# Altium PCB Sistema.PcbDoc (part 1 of 2)
Units mm, origin at the board's own origin, x right, y up, seen from the top; angles counter-clockwise.
Board outline 81.66 x 60.96 mm, 2 copper layers (Top Layer, Bottom Layer); 81 components, 62 nets, 413 pads, 84 vias.
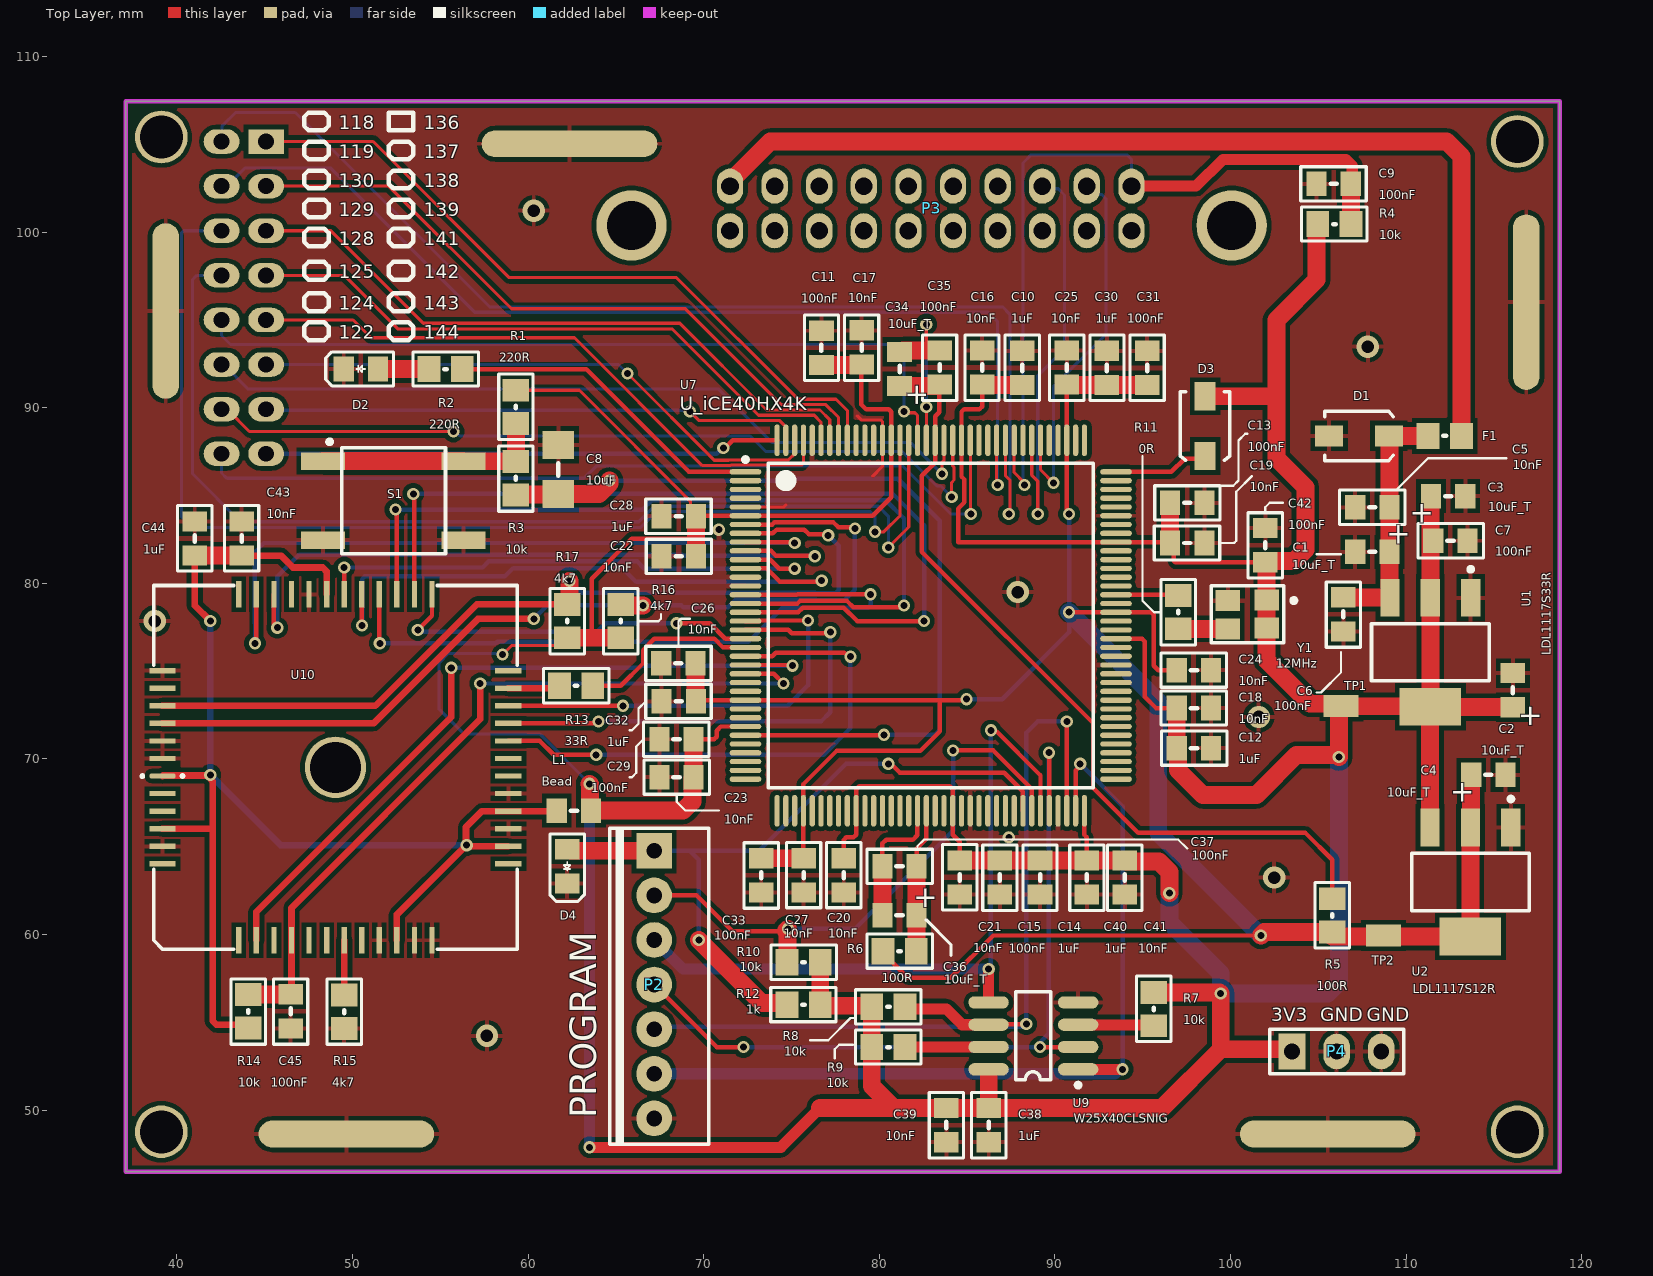
[diagram p0: Top Layer view]
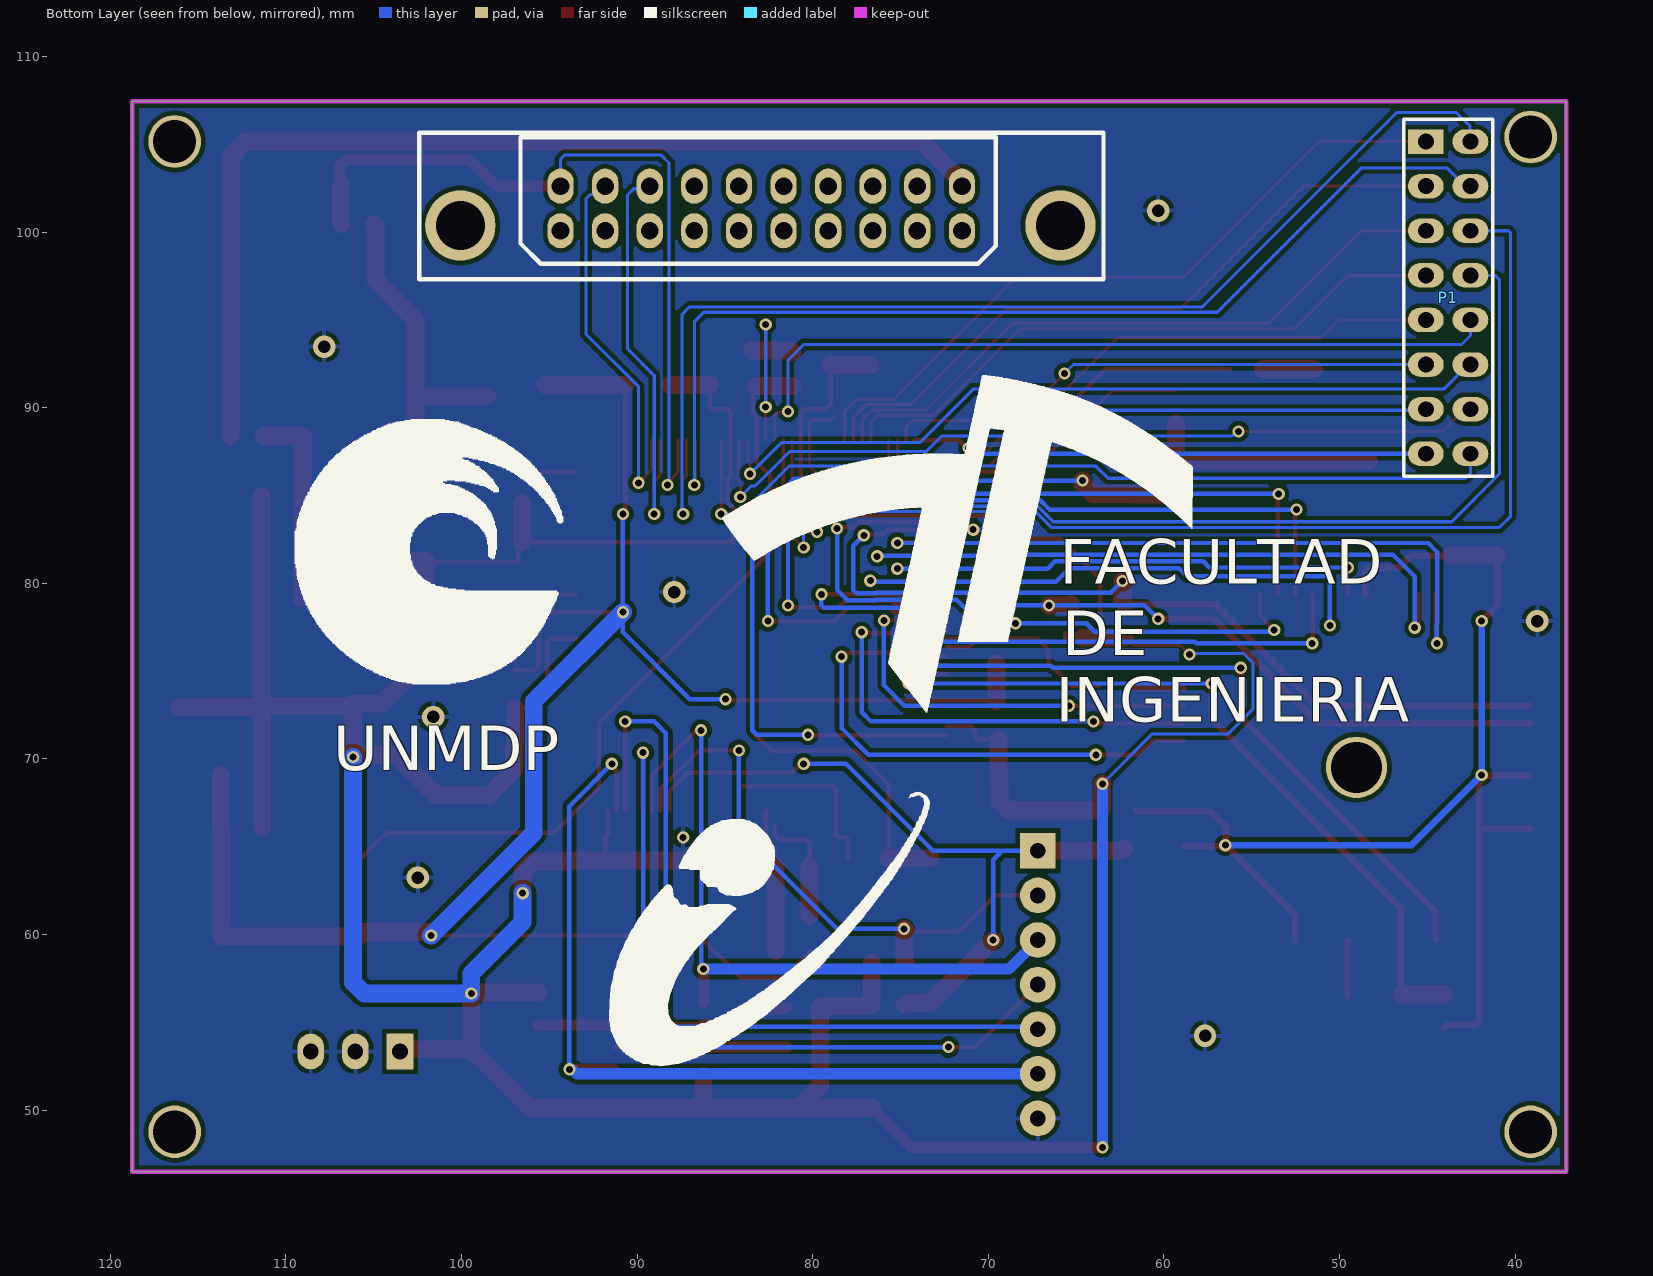
[diagram p1: Bottom Layer view, seen from below]
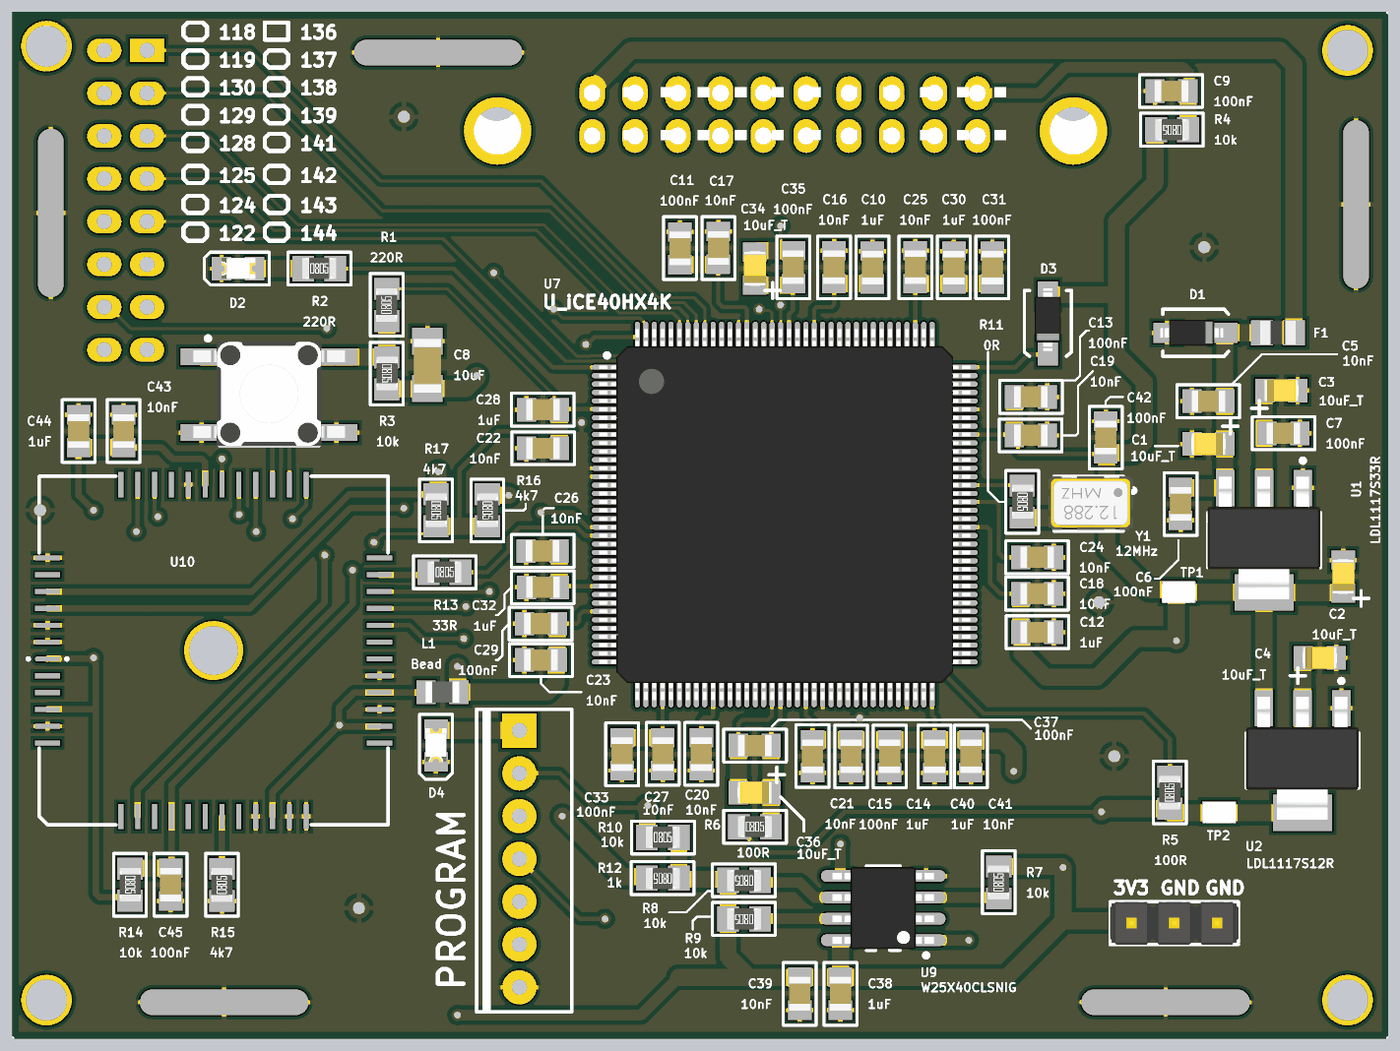
[diagram p2: 3D render of the assembled board from above, using the file's embedded part models]

## Layer stack, top to bottom
Top Solder: solder mask 0.0102, Solder Resist, Dk 3.5
Top Layer: signal copper 0.0356
Dielectric 1: dielectric 0.32, FR-4, Dk 4.8
Bottom Layer: signal copper 0.0356
Bottom Solder: solder mask 0.0102, Solder Resist, Dk 3.5

## Board outline
37.084,46.482 37.084,107.442 118.745,107.442 118.745,46.482

## Design rules (kind name [scope] priority, off if disabled: settings)
Clearance [All] p1: gap=0.254 ignorepadtopadclearanceinfootprint=FALSE except(0: Arc-Hole Track-Hole SMDPad-Hole THPad-Hole Via-Hole Fill-Hole Poly-Hole Region-Hole Text-Hole; 0.127: Arc-Arc Arc-Track Arc-SMDPad Arc-Text Track-Track Track-SMDPad Track-Text SMDPad-SMDPad SMDPad-Text THPad-Text Via-Text Fill-Text Poly-Text Region-Text Text-Text)
PlaneConnect [All] p1: planeconnectstyle=Relief reliefexpansion=0.254 reliefentries=4 reliefconductorwidth=0.178 reliefairgap=0.127
PolygonConnect [All] p1: connectstyle=Relief reliefconductorwidth=0.254 reliefentries=4 polygonreliefangle="90 Angle" airgapwidth=0.254
RoutingVias [All] p1: holewidth=0.4 width=0.7 viastyle="Through Hole" minholewidth=0.2 minwidth=0.6 maxholewidth=5 maxwidth=6
SilkToSolderMaskClearance [IsPad] p1: minsilkscreentomaskgap=0.127 clearancetoexposedcopper=TRUE
SolderMaskExpansion [All] p1: expansion=0.102 istentingtop=FALSE
Width [All] p1: maxlimit=1.016 minlimit=0.178 preferedwidth=0.254 minimp=50.000000 maximp=50.000000 favimp=50.000000
28 further rules are at their usual default settings.

## Classes and differential pairs
component class Sistema: P3
component class "Radiaton Sensor": C43 C44 C45 L1 R13 R14 R15 R16 R17 U10
component class Power: C1 C2 C3 C4 C5 C6 C7 D1 F1 P4 TP1 TP2 U1 U2
component class "Periferic Supply": C10 C11 C12 C13 C14 C15 C16 C17 C18 C19 C20 C21 C22 C23 C24 C25 C26 C27 C28 C29 C30 C31 C32 C33 C34 C35 C36 C37 C38 C39 C40 C41 C42 D3 D4 P2 R5 R6 R7 R8 R9 R10 R11 R12 U7 U9 Y1
component class "FPGA Banks": C8 C9 D2 P1 R1 R2 R3 R4 S1

## Components (designator, comment, footprint, x,y, rotation, side; value= is the part's Value field where it differs from the comment)
C1 "10uF_T" C_0805_2013_c 108.077,81.788 r180 top
C2 "10uF_T" C_0805_2013_c 116.078,73.914 r90 top
C3 "10uF_T" C_0805_2013_c 112.395,84.963 r0 top
C4 "10uF_T" C_0805_2013_c 114.681,69.088 r0 top
C5 "10nF" C_0805_2013_b 108.077,84.328 r0 top
C6 "100nF" C_0805_2013_b 106.426,78.232 r90 top
C7 "100nF" C_0805_2013_b 112.522,82.423 r180 top
C8 "10uF" C_1206_3216_A 61.722,86.487 r270 top
C9 "100nF" C_0805_2013_b 105.877,102.743 r0 top
C10 "1uF" C_0805_2013_b 88.138,92.263 r270 top
C11 "100nF" C_0805_2013_b 76.708,93.406 r270 top
C12 "1uF" C_0805_2013_b 97.917,70.612 r180 top
C13 "100nF" C_0805_2013_b 97.536,84.582 r180 top
C14 "1uF" C_0805_2013_b 89.154,63.246 r90 top
C15 "100nF" C_0805_2013_b 86.868,63.246 r90 top
C16 "10nF" C_0805_2013_b 85.852,92.288 r90 top
C17 "10nF" C_0805_2013_b 78.994,93.431 r90 top
C18 "10nF" C_0805_2013_b 97.917,72.898 r0 top
C19 "10nF" C_0805_2013_b 97.536,82.296 r0 top
C20 "10nF" C_0805_2013_b 77.978,63.373 r270 top
C21 "10nF" C_0805_2013_b 84.582,63.246 r270 top
C22 "10nF" C_0805_2013_b 68.58,81.534 r180 top
C23 "10nF" C_0805_2013_b 68.453,68.961 r180 top
C24 "10nF" C_0805_2013_b 97.917,75.057 r0 top
C25 "10nF" C_0805_2013_b 90.678,92.288 r90 top
C26 "10nF" C_0805_2013_b 68.555,75.438 r180 top
C27 "10nF" C_0805_2013_b 75.692,63.373 r270 top
C28 "1uF" C_0805_2013_b 68.58,83.82 r0 top
C29 "100nF" C_0805_2013_b 68.453,71.12 r0 top
C30 "1uF" C_0805_2013_b 92.964,92.263 r270 top
C31 "100nF" C_0805_2013_b 95.25,92.263 r270 top
C32 "1uF" C_0805_2013_b 68.58,73.279 r0 top
C33 "100nF" C_0805_2013_b 73.279,63.373 r90 top
C34 "10uF_T" C_0805_2013_c 81.153,92.202 r90 top
C35 "100nF" C_0805_2013_b 83.439,92.288 r90 top
C36 "10uF_T" C_0805_2013_c 81.153,61.087 r180 top
C37 "100nF" C_0805_2013_b 81.153,63.881 r180 top
C38 "1uF" C_0805_2013_b 86.233,49.149 r90 top
C39 "10nF" C_0805_2013_b 83.82,49.149 r90 top
C40 "1uF" C_0805_2013_b 91.821,63.246 r90 top
C41 "10nF" C_0805_2013_b 93.98,63.246 r90 top
C42 "100nF" C_0805_2013_b 101.981,82.169 r90 top
C43 "10nF" C_0805_2013_b 43.688,82.55 r270 top
C44 "1uF" C_0805_2013_b 41.021,82.55 r270 top
C45 "100nF" C_0805_2013_b 46.482,55.626 r90 top
D1 "MMSZ5231C-HE3_A-08" D_SOD-123 107.315,88.392 r0 top
D2 "GREEN" D_LED_0805_2013 50.48,92.202 r180 top
D3 "SD0805S020S0R5" D_SOD-123 98.552,88.949 r270 top
D4 "GREEN" D_LED_0805_2013 62.23,63.881 r270 top
F1 "0" F_0805_2012 112.202,88.392 r180 top
L1 "Bead" L_0805_2013 62.611,67.056 r180 top
P1 "Header 8x2" P_HDR2X8_3D 43.815,96.266 r270 bottom
P2 "PROGRAM" P_CON1X7 67.183,55.88 r270 top value="BORNERA 6 ENCH"
P3 "Header 20_H" P_DIN41612-20-H 82.978,101.346 r180 top
P4 "Header 3" P_HDR1X3_3D 106.045,53.34 r0 top
R1 "220R" R_0805_2012_a 59.309,90.043 r90 top
R2 "220R" R_0805_2012_a 55.306,92.202 r0 top
R3 "10k" R_0805_2012_a 59.309,85.979 r270 top
R4 "10k" R_0805_2012_a 105.918,100.457 r180 top
R5 "100R" R_0805_2012_a 105.791,61.087 r90 top
R6 "100R" R_0805_2012_a 81.153,59.055 r0 top
R7 "10k" R_0805_2012_a 95.631,55.753 r90 top
R8 "10k" R_0805_2012_a 80.518,53.594 r180 top
R9 "10k" R_0805_2012_a 80.518,55.88 r180 top
R10 "10k" R_0805_2012_a 75.692,58.42 r0 top
R11 "0R" R_0805_2012_a 97.028,78.359 r270 top
R12 "1k" R_0805_2012_a 75.692,56.007 r180 top
R13 "33R" R_0805_2012_a 62.738,74.168 r0 top
R14 "10k" R_0805_2012_a 44.069,55.626 r270 top
R15 "4k7" R_0805_2012_a 49.53,55.601 r90 top
R16 "4k7" R_0805_2012_a 65.278,77.851 r270 top
R17 "4k7" R_0805_2012_a 62.23,77.851 r270 top
S1 "Switch" S_SMD_SPST-NO 52.324,84.709 r0 top
TP1 "SMD Test Point" "TP SMD" 106.299,73.025 r0 top
TP2 "SMD Test Point" "TP SMD" 108.712,59.944 r0 top
U1 "LDL1117S33R" U_SOT-223 111.379,76.073 r270 top value=LDL1117S25R
U2 "LDL1117S12R" U_SOT-223 113.665,62.992 r270 top value=LDL1117S25R
U7 "U_iCE40HX4K" U_TQFP-144 82.931,77.597 r0 top
U9 "W25X40CLSNIG" U_SOIC-8_2 88.773,54.229 r180 top
U10 "Value" U_CLCC48_SOCKET 39.18,69.025 r90 top
Y1 "12MHz" Y_SMD-XTAL-12MHZ 101.092,78.232 r270 top

## Footprints (in the part's own frame and the unit in brackets; to place one, negate y for a bottom-side part, rotate by r counter-clockwise, add the part's x,y. Pads: shape width x height; smd on the part's side, far side on the other; paste and mask are expansions set on the pad)
C_0805_2013_b [mm] "Chip Capacitor; Body 2.0 x 1.3 mm (LxW typ)"
  rect 1.15x1.4 smd: 1(-0.975,0) 2(0.975,0)
  silkscreen extent -1.88,-0.97 1.85,0.97, body extent -1,-0.64 1,0.64, height 1.24
C_0805_2013_c [mm] "Chip Capacitor; Body 2.0 x 1.3 mm (LxW typ)"
  rect 1.15x1.4 smd: 1(-0.975,0) 2(0.975,0)
  silkscreen extent -0.18,0 0.18,0, body extent -1.02,-0.65 1.03,0.65, height 1.2
C_1206_3216_A [mm]
  rect 1.6x1.8 smd: 1(-1.4,0) 2(1.4,0)
  silkscreen extent -0.36,0 0.36,0, body extent -1.55,-0.81 1.65,0.81, height 1.61
D_LED_0805_2013 [mm] "Chip Capacitor; Body 2.0 x 1.3 mm (LxW typ)"
  rect 1.15x1.4 smd: 1(0.975,0) 2(-0.975,0)
  silkscreen extent -1.85,-0.97 2,0.97, body extent -1.02,-0.62 0.97,0.63, height 1.3
D_SOD-123 [mm] "SOD-123; 2 Leads; Body 2.7 x 1.6 mm, (LxW)"
  rect 1.6x1.2 smd: 1(1.7,0) 2(-1.7,0)
  silkscreen extent -1.95,-1.4 1.95,1.4, body extent -2.09,-0.78 1.63,0.77, height 1.35
F_0805_2012 [mm] "Chip Fuse; Body 2.0 x 1.3 mm (LxW typ)"
  rect 1.3x1.5 smd: 1(-0.95,0) 2(0.95,0)
  silkscreen extent -0.08,0 0.08,0, body extent -1.05,-0.7 1.05,0.7, height 0.56
L_0805_2013 [mm] "Chip Inductor; Body 2.0 x 1.3 mm (LxW typ)"
  rect 1.15x1.4 smd: 1(-0.975,0) 2(0.975,0)
  silkscreen extent -0.18,0 0.18,0, body extent -1,-0.64 1,0.64, height 1.04
P_CON1X7 [mil]
  rect 80x80 hole 35.43: 1(-350,0)
  round 80 hole 35.43: 2(-250,0) 3(-150,0) 4(-50,0) 5(50,0) 6(150,0) 7(250,0)
  silkscreen extent -400,-100 308,122
P_DIN41612-20-H [mm] "20 Position Din Connector Plug, Female Pins Gold Through Hole"
  oval 1.5x2 hole 1: A1(11.477,-1.27) A2(8.937,-1.27) A3(6.397,-1.27) A4(3.857,-1.27) A5(1.317,-1.27) A6(-1.223,-1.27) A7(-3.763,-1.27) A8(-6.303,-1.27) A9(-8.843,-1.27) A10(-11.383,-1.27) B1(11.477,1.27) B2(8.937,1.27) B3(6.397,1.27) B4(3.857,1.27) B5(1.317,1.27) B6(-1.223,1.27) B7(-3.763,1.27) B8(-6.303,1.27) B9(-8.843,1.27) B10(-11.383,1.27)
  round 4 hole 2.8: SOP(-17.087,0.97) SOP(17.088,0.97)
  body extent -19.41,-4.11 19.49,3.99, height 3.5
P_HDR1X3_3D [mil]
  rect 60x80 hole 35.43: 1(-100,0)
  oval 60x80 hole 35.43: 2(0,0) 3(100,0)
  silkscreen extent -150,-50 150,50, body extent -150,-50 150,50, height 374
P_HDR2X8_3D [mil] "Connector; Header; 8x2 Position"
  rect 55x80 hole 35.43: 1(-350,-50)
  oval 55x80 hole 35.43: 2(-350,50) 3(-250,-50) 4(-250,50) 5(-150,-50) 6(-150,50) 7(-50,-50) 8(-50,50) 9(50,-50) 10(50,50) 11(150,-50) 12(150,50) 13(250,-50) 14(250,50) 15(350,-50) 16(350,50)
  silkscreen extent -400,-100 400,100
R_0805_2012_a [mm] "Chip Resistor; Body 2.0 x 1.3 mm (LxW typ)"
  rect 1.3x1.5 smd: 1(-0.95,0) 2(0.95,0)
  silkscreen extent -1.85,-0.97 1.88,0.97, body extent -1,-0.61 1,0.64, height 0.6
S_SMD_SPST-NO [mm] "Pulsador SMD"
  rect 2.5x1 smd: 1(-4,2.25) 1(4,2.25) 2(-4,-2.25) 2(4,-2.25)
  silkscreen extent -3.75,-3.02 2.98,3.47, body extent -4.5,-3.05 4.5,3.15, height 4.3
"TP SMD" [mm] "Test Point SMD"
  rect 2x1.25 smd: 1(0,0)
  body extent -0.99,-0.67 1.01,0.58, height 0.84
U_CLCC48_SOCKET [mm]
  oval 0.3x1.5 smd: 1(0,0)
  rect 0.3x1.5 smd: 2(-1,0) 3(-2,0) 4(-3,0) 5(-4,0) 6(-5,0) 19(-5,-19.7) 20(-4,-19.7) 21(-3,-19.7) 22(-2,-19.7) 23(-1,-19.7) 24(0,-19.7) 25(1,-19.7) 26(2,-19.7) 27(3,-19.7) 28(4,-19.7) 29(5,-19.7) 30(6,-19.7) 43(6,0) 44(5,0) 45(4,0) 46(3,0) 47(2,0) 48(1,0)
  rect 1.5x0.3 smd: 7(-9.35,-4.35) 8(-9.35,-5.35) 9(-9.35,-6.35) 10(-9.35,-7.35) 11(-9.35,-8.35) 12(-9.35,-9.35) 13(-9.35,-10.35) 14(-9.35,-11.35) 15(-9.35,-12.35) 16(-9.35,-13.35) 17(-9.35,-14.35) 18(-9.35,-15.35) 31(10.35,-15.35) 32(10.35,-14.35) 33(10.35,-13.35) 34(10.35,-12.35) 35(10.35,-11.35) 36(10.35,-10.35) 37(10.35,-9.35) 38(10.35,-8.35) 39(10.35,-7.35) 40(10.35,-6.35) 41(10.35,-5.35) 42(10.35,-4.35)
  round 3.5 hole 2.9: 14(0.498,-9.854)
  silkscreen extent -9.85,-20.2 10.85,1.18
U_SOIC-8_2 [mm] "SOIC, 8-Leads, Body 4.9x3.9mm, Pitch 1.27mm, IPC Low Density"
  oval 2.3x0.7 smd: 1(-2.55,1.905) 2(-2.55,0.635) 3(-2.55,-0.635) 4(-2.55,-1.905) 5(2.55,-1.905) 6(2.55,-0.635) 7(2.55,0.635) 8(2.55,1.905)
  silkscreen extent -2.68,-2.5 1,2.93, body extent -3.01,-2.45 3.01,2.45, height 1.5
U_SOT-223 [mm]
  rect 2.15x1.1 smd: 1(-3.1,2.3) 2(-3.1,0) 3(-3.1,-2.3)
  rect 2.15x3.5 smd: 4(3.1,0)
  silkscreen extent -4.85,-3.35 1.63,3.35, body extent -3.78,-3.37 3.52,3.33, height 1.8
U_TQFP-144 [mm]
  oval 1.8x0.3 smd: 1(-10.55,8.75) 2(-10.55,8.25) 3(-10.55,7.75) 4(-10.55,7.25) 5(-10.55,6.75) 6(-10.55,6.25) 7(-10.55,5.75) 8(-10.55,5.25) 9(-10.55,4.75) 10(-10.55,4.25) 11(-10.55,3.75) 12(-10.55,3.25) 13(-10.55,2.75) 14(-10.55,2.25) 15(-10.55,1.75) 16(-10.55,1.25) 17(-10.55,0.75) 18(-10.55,0.25) 19(-10.55,-0.25) 20(-10.55,-0.75) 21(-10.55,-1.25) 22(-10.55,-1.75) 23(-10.55,-2.25) 24(-10.55,-2.75) 25(-10.55,-3.25) 26(-10.55,-3.75) 27(-10.55,-4.25) 28(-10.55,-4.75) 29(-10.55,-5.25) 30(-10.55,-5.75) 31(-10.55,-6.25) 32(-10.55,-6.75) 33(-10.55,-7.25) 34(-10.55,-7.75) 35(-10.55,-8.25) 36(-10.55,-8.75) 73(10.55,-8.75) 74(10.55,-8.25) 75(10.55,-7.75) 76(10.55,-7.25) 77(10.55,-6.75) 78(10.55,-6.25) 79(10.55,-5.75) 80(10.55,-5.25) 81(10.55,-4.75) 82(10.55,-4.25) 83(10.55,-3.75) 84(10.55,-3.25) 85(10.55,-2.75) 86(10.55,-2.25) 87(10.55,-1.75) 88(10.55,-1.25) 89(10.55,-0.75) 90(10.55,-0.25) 91(10.55,0.25) 92(10.55,0.75) 93(10.55,1.25) 94(10.55,1.75) 95(10.55,2.25) 96(10.55,2.75) 97(10.55,3.25) 98(10.55,3.75) 99(10.55,4.25) 100(10.55,4.75) 101(10.55,5.25) 102(10.55,5.75) 103(10.55,6.25) 104(10.55,6.75) 105(10.55,7.25) 106(10.55,7.75) 107(10.55,8.25) 108(10.55,8.75)
  oval 0.3x1.8 smd: 37(-8.75,-10.55) 38(-8.25,-10.55) 39(-7.75,-10.55) 40(-7.25,-10.55) 41(-6.75,-10.55) 42(-6.25,-10.55) 43(-5.75,-10.55) 44(-5.25,-10.55) 45(-4.75,-10.55) 46(-4.25,-10.55) 47(-3.75,-10.55) 48(-3.25,-10.55) 49(-2.75,-10.55) 50(-2.25,-10.55) 51(-1.75,-10.55) 52(-1.25,-10.55) 53(-0.75,-10.55) 54(-0.25,-10.55) 55(0.25,-10.55) 56(0.75,-10.55) 57(1.25,-10.55) 58(1.75,-10.55) 59(2.25,-10.55) 60(2.75,-10.55) 61(3.25,-10.55) 62(3.75,-10.55) 63(4.25,-10.55) 64(4.75,-10.55) 65(5.25,-10.55) 66(5.75,-10.55) 67(6.25,-10.55) 68(6.75,-10.55) 69(7.25,-10.55) 70(7.75,-10.55) 71(8.25,-10.55) 72(8.75,-10.55) 109(8.75,10.55) 110(8.25,10.55) 111(7.75,10.55) 112(7.25,10.55) 113(6.75,10.55) 114(6.25,10.55) 115(5.75,10.55) 116(5.25,10.55) 117(4.75,10.55) 118(4.25,10.55) 119(3.75,10.55) 120(3.25,10.55) 121(2.75,10.55) 122(2.25,10.55) 123(1.75,10.55) 124(1.25,10.55) 125(0.75,10.55) 126(0.25,10.55) 127(-0.25,10.55) 128(-0.75,10.55) 129(-1.25,10.55) 130(-1.75,10.55) 131(-2.25,10.55) 132(-2.75,10.55) 133(-3.25,10.55) 134(-3.75,10.55) 135(-4.25,10.55) 136(-4.75,10.55) 137(-5.25,10.55) 138(-5.75,10.55) 139(-6.25,10.55) 140(-6.75,10.55) 141(-7.25,10.55) 142(-7.75,10.55) 143(-8.25,10.55) 144(-8.75,10.55)
  silkscreen extent -10.67,-9.25 9.25,9.57, body extent -11.01,-11.01 11.01,11.01, height 1.63
Y_SMD-XTAL-12MHZ [mm]
  rect 1.2x1.4 smd: 1(-0.826,0.965) 2(-0.787,-1.245) 3(0.826,-1.245) 4(0.787,0.965)
  silkscreen extent -1.63,-2.18 1.62,2.64, body extent -1.65,-2.51 1.55,2.49, height 1.2

## Part data
C1 C2 C3 C4 C34 C36: library part C_10uF_10V_b, "Capacitor SMD 0805 Tant", Manufacturer=Vishay, Manufacturer Part Number=TMCP1A106MTRF, Supplier Part Number 1=74-TMCP1A106MTRF, Category="Tantalum Capacitors", Pricing 1="1=0,3, 10=0,152, 50=0,152, 100=0,098, 1000=0,082, 10000=0,067 (USD)", RoHS=Yes, RoHS Compliant=Yes, Stock 1=7293, Supplier 1=Mouser
C5 C16 C17 C18 C19 C20 C21 C22 C23 C24 C25 C26 C27 C39 C41 C43: library part C_10nF_50V_b, "Capacitor SMD 0805", Case Code (Imperial)=0805, Case Code (Metric)=2012, Dielectric=X7R, Dielectric Material=Ceramic, Manufacturer=KEMET, Manufacturer Part Number=C0805C103J5RAC7210, Max Operating Temperature=125°C, Min Operating Temperature=-55°C, Package Quantity=10000, Supplier Part Number 1=80-C0805C103J5R7210, Tolerance=5%, Voltage Rating=50V, Case/Package=0805, Category="Ceramic Capacitors", ComponentLink1Description=http://www.mouser.com/ds/2/212/KEM_C1002_X7R_SMD-1102033.pdf?src-supplier=Mouser, ComponentLink1URL=http://www.mouser.com/ds/2/212/KEM_C1002_X7R_SMD-1102033.pdf?src-supplier=Mouser, ComponentLink2Description=http://components.arrow.com/part/dataview/3450688S9650973N7429?src-supplier=Arrow+Electronics, ComponentLink2URL=http://components.arrow.com/part/dataview/3450688S9650973N7429?src-supplier=Arrow+Electronics, ComponentLink3Description=https://datasheet.octopart.com/C0805C103J5RAC7210-KEMET-datasheet-68331906.pdf?src-supplier=Farnell, ComponentLink3URL=https://datasheet.octopart.com/C0805C103J5RAC7210-KEMET-datasheet-68331906.pdf?src-supplier=Farnell, ComponentLink4Description=https://api.kemet.com/component-edge/download/datasheet/C0805C103J5RAC7210.pdf?src-supplier=Digikey, ComponentLink4URL=https://api.kemet.com/component-edge/download/datasheet/C0805C103J5RAC7210.pdf?src-supplier=Digikey, ComponentLink5Description=https://datasheet.octopart.com/C0805C103J5RAC7210-KEMET-datasheet-37550250.pdf?src-supplier=Electro+Sonic, ComponentLink5URL=https://datasheet.octopart.com/C0805C103J5RAC7210-KEMET-datasheet-37550250.pdf?src-supplier=Electro+Sonic, ComponentLink6Description=https://datasheet.octopart.com/C0805C103J5RAC7210-KEMET-datasheet-166547538.pdf?src-supplier=TME, ComponentLink6URL=https://datasheet.octopart.com/C0805C103J5RAC7210-KEMET-datasheet-166547538.pdf?src-supplier=TME, Depth=1.25mm, Lead Pitch=0.75mm, Length=2mm, Packaging="Tape and Reel", Pricing 1="1=0,1, 10=0,034, 50=0,034, 100=0,02, 1000=0,014, 10000=0,009 (USD)", RoHS=Yes, RoHS Compliant=Yes, Series="SMD Comm X7R", Stock 1=30128, Supplier 1=Mouser, Termination=SMD/SMT, Voltage Rating (DC)=50V
C6 C7 C9 C11 C13 C15 C29 C31 C33 C35 C37 C42 C45: library part C_100nF_50V_b, "Capacitor SMD 0805", Case Code (Imperial)=0805, Case Code (Metric)=2012, Dielectric=X7R, Insulation Resistance=100GR, Manufacturer=Yageo, Manufacturer Part Number=CC0805KRX7R9BB104, Max Operating Temperature=125°C, Min Operating Temperature=-55°C, Package Quantity=4000, Supplier Part Number 1=311-1140-1-ND, Tolerance=10%, Voltage=50V, Case/Package=0805, Category="Ceramic Capacitors", ComponentLink1Description=https://datasheet.ciiva.com/11786/0900766b80d84f1d-11786009.pdf?src-supplier=Rs, ComponentLink1URL=https://datasheet.ciiva.com/11786/0900766b80d84f1d-11786009.pdf?src-supplier=Rs, ComponentLink2Description=https://datasheet.ciiva.com/46393/1734573-46393307.pdf?src-supplier=Element14, ComponentLink2URL=https://datasheet.ciiva.com/46393/1734573-46393307.pdf?src-supplier=Element14, ComponentLink3Description=https://datasheet.ciiva.com/155/mlccorderingcode-155930.pdf?src-supplier=Digikey, ComponentLink3URL=https://datasheet.ciiva.com/155/mlccorderingcode-155930.pdf?src-supplier=Digikey, ComponentLink4Description=https://datasheet.ciiva.com/155/mlccorderingcode-155929.pdf?src-supplier=Digikey, ComponentLink4URL=https://datasheet.ciiva.com/155/mlccorderingcode-155929.pdf?src-supplier=Digikey, ComponentLink5Description=https://datasheet.ciiva.com/155/mlccorderingcode-155931.pdf?src-supplier=Digikey, ComponentLink5URL=https://datasheet.ciiva.com/155/mlccorderingcode-155931.pdf?src-supplier=Digikey, ComponentLink6Description=https://datasheet.ciiva.com/11464/upy-gphc-x7r-6-3v-to-50v-8-11464757.pdf?src-supplier=Avnet, ComponentLink6URL=https://datasheet.ciiva.com/11464/upy-gphc-x7r-6-3v-to-50v-8-11464757.pdf?src-supplier=Avnet, ComponentLink7Description=https://datasheet.ciiva.com/28450/1489800-28450805.pdf?src-supplier=Element14, ComponentLink7URL=https://datasheet.ciiva.com/28450/1489800-28450805.pdf?src-supplier=Element14, ComponentLink8Description=https://datasheet.ciiva.com/29242/445210-da-01-en-kerko-chip-0805-x7r-0-1uf-10proz-50vg-29242074.pdf?src-supplier=Conrad, ComponentLink8URL=https://datasheet.ciiva.com/29242/445210-da-01-en-kerko-chip-0805-x7r-0-1uf-10proz-50vg-29242074.pdf?src-supplier=Conrad, Depth=1.25mm, Halogen Free=5694HalogenFree, Height=0.85mm, Lead Free=5697LeadFree, Length=2mm, Material=Ceramic, Mounting Technology="Surface Mount", Packaging="Tape and Reel", Pins=2, Pricing 1="1=0,1, 10=0,07, 50=0,0418, 100=0,0329, 500=0,02428, 1000=0,0201 (USD)", Radiation Hardening=No, Reach SVHC Compliant=No, RoHS=Yes, RoHS Compliant=Yes, Series=CC, Stock 1=5306374, Supplier 1=Digikey, Termination=SMD/SMT, Voltage Rating=50V
C8: library part C_10uF_25V_c, "Capacitor SMD 1206", Case Code (Imperial)=1206, Case Code (Metric)=3216, Dielectric=X7R, Manufacturer=Samsung, Manufacturer Part Number=CL31B106KAHNFNE, Max Operating Temperature=125°C, Min Operating Temperature=-55°C, Supplier Part Number 1=1276-3100-1-ND, Tolerance=10%, Voltage Rating=25V, Case/Package=1206, Category="Ceramic Capacitors", ComponentLink1Description=https://datasheet.ciiva.com/25795/cl31b106kahnfne-25795136.pdf?src-supplier=Digikey, ComponentLink1URL=https://datasheet.ciiva.com/25795/cl31b106kahnfne-25795136.pdf?src-supplier=Digikey, Construction=Flat, Depth=1.6mm, Height=1.6mm, Lead Free="Lead Free", Length=3.2mm, Mounting Technology="Surface Mount", Packaging="Tape and Reel", Pricing 1="1=0,23, 10=0,149, 50=0,094, 100=0,0752, 500=0,0543, 1000=0,04804 (USD)", Radiation Hardening=No, RoHS=Yes, RoHS Compliant=Yes, Series=CL, Stock 1=466532, Supplier 1=Digikey
C10 C12 C14 C28 C30 C32 C38 C40 C44: library part C_1uF_50V_b, "Capacitor SMD 0805", JLCPCB Part #=C17287262, Manufacturer="Cal-Chip Electronics", Manufacturer Part Number=GMC21X7R105K50NT, Supplier Part Number 1=4713-GMC21X7R105K50NTCT-ND, Category="Ceramic Capacitors", Pricing 1="1=0,16, 10=0,106, 50=0,0632, 100=0,0497, 500=0,03672, 1000=0,0304 (USD)", RoHS=Yes, Stock 1=1410, Supplier 1=Digikey
D1: library part D_MMSZ5231C-HE3_A-08, "Diode SMD SOD-123 Zener 5V1", Manufacturer="Vishay Semiconductors", Manufacturer Part Number=MMSZ5226C-E3-08, Max Operating Temperature=150°C, Max Power Dissipation=500mW, Max Reverse Leakage Current=25uA, Min Operating Temperature=-55°C, Package Quantity=3000, Supplier Part Number 1=78-MMSZ5231CHE3_A-08, Tolerance=2%, Zener Current=20mA, Zener Voltage=3.3V, Category="Zener Diodes", ComponentLink1Description=Datasheet, ComponentLink1URL=https://www.vishay.com/docs/86344/mmsz5225_to_mmsz5267.pdf, Impedance=28R, Mounting Technology="Surface Mount", Packaging="Tape and Reel", Power Dissipation=500mW, Pricing 1="1=0,29, 10=0,198, 50=0,198, 100=0,089, 1000=0,062, 10000=0,041 (USD)", RoHS=Yes, RoHS Compliant=Yes, Series="Automotive, AEC-Q101", Stock 1=14347, Supplier 1=Mouser, Voltage Tolerance=2%, Weight=0.000363oz
D2 D4: library part D_LED_SMD_0805, "(Modificar) Diode SMD 0805"
D3: library part D_SD0805S020S0R5, "Diode SMD D_SD0805S020S0R5", Average Rectified Current=5A, Case/Package=SMC, Forward Voltage=700mV, Manufacturer=Diodes, Manufacturer Part Number=B550C-13-F, Max Forward Surge Current (Ifsm)=100A, Max Operating Temperature=125°C, Max Repetitive Reverse Voltage (Vrrm)=50V, Max Reverse Current=500uA, Min Operating Temperature=-55°C, Package Quantity=3000, Supplier Part Number 1=478-7799-1-ND, Category="Rectifier Diodes", Contact Plating=Tin,Matte, Current Rating=5A, Forward Current=5A, Height=2.5mm, Lead Free="Lead Free", Length=7.11mm, Max Reverse Voltage (DC)=50V, Mounting Technology="Surface Mount", Output Current=5A, Packaging="Tape and Reel", Peak Non-Repetitive Surge Current=100A, Pins=2, Polarity=Standard, Pricing 1="1=0,56, 10=0,476, 100=0,3309, 500=0,25834, 1000=0,20998 (USD)", Radiation Hardening=No, Reach SVHC Compliant=No, RoHS=Yes, RoHS Compliant=Yes, Series=-, Stock 1=65197, Supplier 1=Digikey, Termination=SMD/SMT, Voltage Rating (DC)=50V, Weight=0.007408oz, Width=6.22mm
F1: library part F_?_0805, "(Generico) Fuse SMD 0805", Supplier Part Number 1=SF-1206S200-2CT-ND, LatestRevisionDate=17-Jul-2002, LatestRevisionNote="Re-released for DXP Platform.", Origin=TAIWAN, PackageDescription="Thru-Hole; 2 Leads", PackageReference=PIN-W2/E2.8, Published=8-Jun-2000, Publisher="Altium Limited", Supplier 1=Digi-Key
L1: library part L_Bead, "Inductor SMD 0805", Case Code (Imperial)=0805, Case Code (Metric)=2012, Manufacturer=Pulse, Manufacturer Part Number=PE-0805PFB600ST, Max Current Rating=3A, Max Operating Temperature=105°C, Min Operating Temperature=-40°C, Package Quantity=4000, Supplier Part Number 1=673-PE-0805PFB600ST, Case/Package=0805, Category="Ferrite Beads and Chips", ComponentLink1Description=https://productfinder.pulseeng.com/doc_type/WEB301/doc_num/WC706/doc_part/WC706.pdf?src-supplier=Digikey, ComponentLink1URL=https://productfinder.pulseeng.com/doc_type/WEB301/doc_num/WC706/doc_part/WC706.pdf?src-supplier=Digikey, ComponentLink2Description=http://productfinder.pulseeng.com/products/datasheets/WC706.pdf?src-supplier=Digikey, ComponentLink2URL=http://productfinder.pulseeng.com/products/datasheets/WC706.pdf?src-supplier=Digikey, Height=0.041inch, Length=0.079inch, Mounting Technology="Surface Mount", Number of Lines=1, Packaging="Cut Tape", Pricing 1="1=0,1, 10=0,051, 50=0,051, 100=0,035, 1000=0,025, 10000=0,02 (USD)", RoHS=Yes, RoHS Compliant=Yes, Series=PFB, Stock 1=58506, Supplier 1=Mouser, Width=0.049inch
P1: library part "P_Conector 8x2"
P2: library part "P_BORNERA 7", "Bornera 7"
P3: library part P_Conector_20_H, "Conector 20 Position Din Connector Plug, Male Pins Gold Through Hole, Right Angle", Current Rating=2A, Flammability Rating="UL94 V-0", Manufacturer="HARTING Technology", Manufacturer Part Number=09242206825, Package Quantity=20, Supplier Part Number 1=617-09-24-220-6825, Category="DIN 41612 Connectors", ComponentLink1Description=https://datasheet.ciiva.com/11731/0900766b811d3497-11731844.pdf?src-supplier=Rs, ComponentLink1URL=https://datasheet.ciiva.com/11731/0900766b811d3497-11731844.pdf?src-supplier=Rs, Connector Type=Receptacle, Contact Material="Copper Alloy", Contact Plating=Gold, Gender=Female, Housing Material=Thermoplastic, Insulation Material=Glass, Lead Free="Lead Free", Mounting Technology="Through Hole", Number of Contacts=20, Number of Positions=20, Number of Rows=2, Orientation=Straight, Packaging=Bulk, Pitch=2.54mm, Pricing 1="1=4,87, 10=4,27, 50=4,27, 100=3,55, 1000=2,94, 10000=2,74 (USD)", RoHS=Yes, RoHS Compliant=Yes, Series="DIN 41612", Shell Size=3B, Stock 1=166, Supplier 1=Mouser, Tail Length=4.5mm, Termination=Solder
P4: library part "P_Header 3", "Header, 3-Pin"
R1 R2: library part R_220R_b, "Resistor SMD 0805", Case Code (Imperial)=0805, Case Code (Metric)=2012, Manufacturer=Bourns, Manufacturer Part Number=CR0805-FX-2200ELF, Max Operating Temperature=155°C, Max Power Dissipation=125mW, Min Operating Temperature=-55°C, Package Quantity=5000, Supplier Part Number 1=CR0805-FX-2200ELFCT-ND, Temperature Coefficient=100ppm/°C, Tolerance=1%, Voltage Rating=150V, Case/Package=0805, Category="Chip SMD Resistors", ComponentLink1Description=https://datasheet.ciiva.com/5540/chpreztr-5540846.pdf?src-supplier=Mouser, ComponentLink1URL=https://datasheet.ciiva.com/5540/chpreztr-5540846.pdf?src-supplier=Mouser, Contact Plating=Tin, Features="Moisture Resistant", Height=0.5mm, Length=2mm, Mounting Technology="Surface Mount", Number of Terminations=2, Packaging="Tape and Reel", Power Rating=125mW, Pricing 1="1=0,1, 10=0,021, 50=0,0132, 100=0,011, 500=0,00744, 1000=0,00639 (USD)", Radiation Hardening=No, RoHS=Yes, RoHS Compliant=Yes, Series=CR0805, Stock 1=162372, Supplier 1=Digikey, Termination=SMD/SMT, Thickness=508um, Width=1.25mm
R3 R4 R7 R8 R9 R10 R14: library part R_10k_b, "Resistor SMD 0805", Case Code (Imperial)=0805, Case Code (Metric)=2012, Manufacturer=Yageo, Manufacturer Part Number=AC0805FR-0710KL, Max Operating Temperature=155°C, Max Power Dissipation=125mW, Min Operating Temperature=-55°C, Package Quantity=1, Supplier Part Number 1=311-10KLGCT-ND, Temperature Coefficient=100ppm/°C, Tolerance=1%, Voltage Rating=150V, Case/Package=0805, Category="Chip SMD Resistors", ComponentLink1Description=http://www.yageo.com/NewPortal/yageodocoutput?fileName=/pdf/R-Chip/PYu-AC_51_RoHS_L_6.pdf&src-supplier=Digikey, ComponentLink1URL=http://www.yageo.com/NewPortal/yageodocoutput?fileName=/pdf/R-Chip/PYu-AC_51_RoHS_L_6.pdf&src-supplier=Digikey, ComponentLink2Description=http://www.yageo.com/documents/recent/PYu-AC_51_RoHS_L_2_revised.pdf?src-supplier=Future+Electronics, ComponentLink2URL=http://www.yageo.com/documents/recent/PYu-AC_51_RoHS_L_2_revised.pdf?src-supplier=Future+Electronics, ComponentLink3Description=http://www.yageo.com/NewPortal/yageodocoutput?fileName=/pdf/R-Chip/PYu-AC_51_RoHS_L_6.pdf&src-supplier=NAC+Semi, ComponentLink3URL=http://www.yageo.com/NewPortal/yageodocoutput?fileName=/pdf/R-Chip/PYu-AC_51_RoHS_L_6.pdf&src-supplier=NAC+Semi, ComponentLink4Description=http://www.yageo.com/NewPortal/yageodocoutput?fileName=/pdf/R-Chip/PYu-AC_51_RoHS_L_6.pdf&src-supplier=Rutronik, ComponentLink4URL=http://www.yageo.com/NewPortal/yageodocoutput?fileName=/pdf/R-Chip/PYu-AC_51_RoHS_L_6.pdf&src-supplier=Rutronik, Construction=Rectangular, Depth=1.25mm, Features="Moisture Resistant,Automotive AEC-Q200,Anti-Sulfur", Height=0.024inch, Lead Free="Lead Free", Length=0.079inch, Military Standard=Not, Number of Terminations=2, Packaging="Tape and Reel", Power Rating=125mW, Pricing 1="1=0,1, 10=0,031, 50=0,0198, 100=0,0166, 500=0,01152, 1000=0,00997 (USD)", RoHS=Yes, RoHS Compliant=Yes, Series=AC, Stock 1=480247, Supplier 1=Digikey, Termination=SMD/SMT, Width=0.049inch
R5 R6: library part R_100R_b, "Resistor SMD 0805", Case Code (Imperial)=0805, Case Code (Metric)=2012, Manufacturer="Vishay Dale", Manufacturer Part Number=CRCW0805100RFKEA, Max Operating Temperature=155°C, Max Power Dissipation=125mW, Min Operating Temperature=-55°C, Package Quantity=10, Resistance Tolerance=1%, Resistor Type="Thick Film", Supplier Part Number 1=71-CRCW0805-100-E3, Temperature Coefficient=100ppm/°C, Voltage Rating=150V, Case/Package=0805, Category="Chip SMD Resistors", ComponentLink1Description=https://datasheet.ciiva.com/2495/dcrcwe3-2495842.pdf?src-supplier=Digikey, ComponentLink1URL=https://datasheet.ciiva.com/2495/dcrcwe3-2495842.pdf?src-supplier=Digikey, ComponentLink2Description=https://datasheet.ciiva.com/16760/70201119-16760940.pdf?src-supplier=Allied+Electronics, ComponentLink2URL=https://datasheet.ciiva.com/16760/70201119-16760940.pdf?src-supplier=Allied+Electronics, ComponentLink3Description=https://datasheet.ciiva.com/16777/70201119-16777129.pdf?src-supplier=Allied+Electronics, ComponentLink3URL=https://datasheet.ciiva.com/16777/70201119-16777129.pdf?src-supplier=Allied+Electronics, ComponentLink4Description=https://datasheet.ciiva.com/5546/dcrcwe3-109170-5546700.pdf?src-supplier=Mouser, ComponentLink4URL=https://datasheet.ciiva.com/5546/dcrcwe3-109170-5546700.pdf?src-supplier=Mouser, Construction=Rectangular, Contact Plating=Tin, Depth=1.25mm, Features="Automotive AEC-Q200", Height=0.45mm, Lead Free=5697LeadFree, Length=2mm, Military Standard=Not, Number of Terminations=2, Packaging="Tape and Reel", Pins=2NUMBER, Power Rating=125mW, Pricing 1="1=0,1, 10=0,025, 50=0,025, 100=0,015, 1000=0,012, 10000=0,008 (USD)", Radiation Hardening=No, Reach SVHC Compliant=Unknown, RoHS=Yes, RoHS Compliant=Yes, Series=CRCW, Stock 1=173839, Supplier 1=Mouser, Technology="THICK FILM", Termination=SMD/SMT, Tolerance=1%, Voltage Rating (DC)=150V, Weight=0.000194oz, Width=0.049inch
R11: library part R_0R_b, "Resistor SMD 0805", Case Code (Imperial)=0805, Case Code (Metric)=2012, Manufacturer="Stackpole Electronics", Manufacturer Part Number=RMCF0805ZT0R00, Max Operating Temperature=155°C, Max Power Dissipation=125mW, Min Operating Temperature=-55°C, Ratings=AEC-Q200, Supplier Part Number 1=RMCF0805ZT0R00CT-ND, Temperature Coefficient=200ppm/°C, Voltage Rating=150V, Case/Package=0805, Category="Chip SMD Resistors", ComponentLink1Description=https://datasheet.ciiva.com/15193/getdatasheetpartid-360417-15193658.pdf?src-supplier=Verical, ComponentLink1URL=https://datasheet.ciiva.com/15193/getdatasheetpartid-360417-15193658.pdf?src-supplier=Verical, Construction=Rectangular, Contact Plating=Tin,Matte, Depth=1.25mm, Features="Automotive AEC-Q200", Height=0.026inch, Lead Free="Lead Free", Length=2mm, Military Standard=Not, Mounting Technology="Surface Mount", Number of Terminations=2, Packaging="Tape and Reel", Power Rating=125mW, Pricing 1="1=0,1, 10=0,017, 25=0,0128, 50=0,0096, 100=0,0068, 250=0,00544, 500=0,00436, 1000=0,00321 (USD)", Radiation Hardening=No, RoHS=Yes, RoHS Compliant=Yes, Series=RMCF, Stock 1=1321891, Supplier 1=Digikey, Width=0.049inch
R12: library part R_1k_b, "Resistor SMD 0805", Case Code (Imperial)=0805, Case Code (Metric)=2012, Manufacturer=Bourns, Manufacturer Part Number=CR0805-FX-1001ELF, Max Operating Temperature=155°C, Max Power Dissipation=125mW, Min Operating Temperature=-55°C, Package Quantity=5000, Resistance Tolerance=1%, Resistor Type="Thick Film", Supplier Part Number 1=CR0805-FX-1001ELFCT-ND, Temperature Coefficient=100ppm/°C, Voltage Rating=150V, Case/Package=0805, Category="Chip SMD Resistors", ComponentLink1Description=https://datasheet.ciiva.com/11810/0900766b80fcdb72-11810305.pdf?src-supplier=Rs, ComponentLink1URL=https://datasheet.ciiva.com/11810/0900766b80fcdb72-11810305.pdf?src-supplier=Rs, ComponentLink2Description=https://datasheet.ciiva.com/27049/775383-27049976.pdf?src-supplier=Jameco, ComponentLink2URL=https://datasheet.ciiva.com/27049/775383-27049976.pdf?src-supplier=Jameco, ComponentLink3Description=https://datasheet.ciiva.com/7986/1856384-7986222.pdf?src-supplier=Element14, ComponentLink3URL=https://datasheet.ciiva.com/7986/1856384-7986222.pdf?src-supplier=Element14, ComponentLink4Description=https://datasheet.ciiva.com/9123/chpreztr-9123643.pdf?src-supplier=Avnet, ComponentLink4URL=https://datasheet.ciiva.com/9123/chpreztr-9123643.pdf?src-supplier=Avnet, ComponentLink5Description=https://datasheet.ciiva.com/6547/chpreztr-6547422.pdf?src-supplier=Digikey, ComponentLink5URL=https://datasheet.ciiva.com/6547/chpreztr-6547422.pdf?src-supplier=Digikey, ComponentLink6Description=https://datasheet.ciiva.com/6547/chpreztr-6547423.pdf?src-supplier=Digikey, ComponentLink6URL=https://datasheet.ciiva.com/6547/chpreztr-6547423.pdf?src-supplier=Digikey, ComponentLink7Description=https://datasheet.ciiva.com/6547/chpreztr-6547421.pdf?src-supplier=Digikey, ComponentLink7URL=https://datasheet.ciiva.com/6547/chpreztr-6547421.pdf?src-supplier=Digikey, ComponentLink8Description=https://datasheet.ciiva.com/30129/159chpreztr-30129981.pdf?src-supplier=Onlinecomponents.com, ComponentLink8URL=https://datasheet.ciiva.com/30129/159chpreztr-30129981.pdf?src-supplier=Onlinecomponents.com, ComponentLink9Description=https://datasheet.ciiva.com/46394/691949-46394380.pdf?src-supplier=Element14, ComponentLink9URL=https://datasheet.ciiva.com/46394/691949-46394380.pdf?src-supplier=Element14, ComponentLink10Description=https://datasheet.ciiva.com/16722/70154685-16722677.pdf?src-supplier=Allied+Electronics, ComponentLink10URL=https://datasheet.ciiva.com/16722/70154685-16722677.pdf?src-supplier=Allied+Electronics, ComponentLink11Description=https://datasheet.ciiva.com/48692/001055506-da-01-en-smd-wid-cr0805-fx-1001elf-1k-ohm-1-8w-48692106.pdf?src-supplier=Conrad, ComponentLink11URL=https://datasheet.ciiva.com/48692/001055506-da-01-en-smd-wid-cr0805-fx-1001elf-1k-ohm-1-8w-48692106.pdf?src-supplier=Conrad, Contact Plating=Tin, Depth=1.25mm, Features="Moisture Resistant", Height=0.5mm, Length=2mm, Mounting Technology="Surface Mount", Number of Terminations=2, Packaging="Tape and Reel", Pins=2, Power Rating=125mW, Pricing 1="1=0,1, 10=0,021, 50=0,0132, 100=0,011, 500=0,00744, 1000=0,00639 (USD)", Radiation Hardening=No, Reach SVHC Compliant=No, RoHS=Yes, RoHS Compliant=Yes, Series=CR0805, Stock 1=453972, Supplier 1=Digikey, Technology="THICK FILM", Termination=SMD/SMT, Thickness=508um, Tolerance=1%, Voltage Rating (DC)=150V, Width=1.25mm
R13: library part R_33R_b, "Resistor SMD 0805", Case Code (Imperial)=0805, Case Code (Metric)=2012, Manufacturer="Stackpole Electronics", Manufacturer Part Number=RMCF0805FT33R0, Max Operating Temperature=155°C, Max Power Dissipation=125mW, Min Operating Temperature=-55°C, Ratings=AEC-Q200, Supplier Part Number 1=RMCF0805FT33R0CT-ND, Temperature Coefficient=100ppm/°C, Tolerance=1%, Voltage Rating=150V, Case/Package=0805, Category="Chip SMD Resistors", ComponentLink1Description=http://components.arrow.com/part/dataview/50498375S389572N1174?src-supplier=Arrow+Electronics, ComponentLink1URL=http://components.arrow.com/part/dataview/50498375S389572N1174?src-supplier=Arrow+Electronics, ComponentLink2Description=https://www.seielect.com/catalog/SEI-RMCF_RMCP.pdf?src-supplier=Avnet, ComponentLink2URL=https://www.seielect.com/catalog/SEI-RMCF_RMCP.pdf?src-supplier=Avnet, ComponentLink3Description=https://www.seielect.com/Catalog/SEI-RMCF_RMCP.pdf?src-supplier=Digikey, ComponentLink3URL=https://www.seielect.com/Catalog/SEI-RMCF_RMCP.pdf?src-supplier=Digikey, ComponentLink4Description=https://www.seielect.com/catalog/SEI-Packaging.pdf?src-supplier=Digikey, ComponentLink4URL=https://www.seielect.com/catalog/SEI-Packaging.pdf?src-supplier=Digikey, Contact Plating=Tin,Matte, Features="Automotive AEC-Q200", Height=0.026inch, Length=0.079inch, Mounting Technology="Surface Mount", Number of Terminations=2, Packaging="Tape and Reel", Pricing 1="1=0,1, 10=0,02, 50=0,0124, 100=0,0103, 500=0,007, 1000=0,00601 (USD)", Radiation Hardening=No, RoHS=Yes, RoHS Compliant=Yes, Series=RMCF, Stock 1=76142, Supplier 1=Digikey, Width=0.049inch
R15 R16 R17: library part R_4k7_b, "Resistor SMD 0805", Case Code (Imperial)=0805, Case Code (Metric)=2012, Manufacturer="Stackpole Electronics", Manufacturer Part Number=RMCF0805FT4K70, Max Operating Temperature=155°C, Max Power Dissipation=125mW, Min Operating Temperature=-55°C, Ratings=AEC-Q200, Supplier Part Number 1=RMCF0805FT4K70CT-ND, Temperature Coefficient=100ppm/°C, Tolerance=1%, Case/Package=0805, Category="Chip SMD Resistors", ComponentLink1Description=https://www.seielect.com/catalog/SEI-RMCF_RMCP.pdf?src-supplier=Avnet, ComponentLink1URL=https://www.seielect.com/catalog/SEI-RMCF_RMCP.pdf?src-supplier=Avnet, ComponentLink2Description=https://www.seielect.com/Catalog/SEI-RMCF_RMCP.pdf?src-supplier=Digikey, ComponentLink2URL=https://www.seielect.com/Catalog/SEI-RMCF_RMCP.pdf?src-supplier=Digikey, ComponentLink3Description=https://www.seielect.com/catalog/SEI-Packaging.pdf?src-supplier=Digikey, ComponentLink3URL=https://www.seielect.com/catalog/SEI-Packaging.pdf?src-supplier=Digikey, ComponentLink4Description=http://components.arrow.com/part/dataview/44988207S7163511N1174?src-supplier=Arrow+Electronics, ComponentLink4URL=http://components.arrow.com/part/dataview/44988207S7163511N1174?src-supplier=Arrow+Electronics, ComponentLink5Description=http://www.seielect.com/catalog/sei-rmc.pdf?src-supplier=Future+Electronics, ComponentLink5URL=http://www.seielect.com/catalog/sei-rmc.pdf?src-supplier=Future+Electronics, ComponentLink6Description=https://datasheet.octopart.com/RMCF0805FT4K70-Stackpole-Electronics-datasheet-11547379.pdf?src-supplier=Future+Electronics, ComponentLink6URL=https://datasheet.octopart.com/RMCF0805FT4K70-Stackpole-Electronics-datasheet-11547379.pdf?src-supplier=Future+Electronics, ComponentLink7Description=https://www.verical.com/server-webapp/html/getDatasheet?partID=409513&src-supplier=Verical, ComponentLink7URL=https://www.verical.com/server-webapp/html/getDatasheet?partID=409513&src-supplier=Verical, Construction=Rectangular, Contact Plating=Tin,Matte, Depth=1.25mm, Features="Automotive AEC-Q200", Height=0.026inch, Lead Free="Lead Free", Length=2mm, Military Standard=Not, Mounting Technology="Surface Mount", Number of Terminations=2, Packaging="Tape and Reel", Power Rating=125mW, Pricing 1="1=0,1, 10=0,02, 50=0,0124, 100=0,0103, 500=0,007, 1000=0,00601 (USD)", Radiation Hardening=No, RoHS=Yes, RoHS Compliant=Yes, Series=RMCF, Stock 1=619298, Supplier 1=Digikey, Width=0.049inch
S1: library part S_?_3, "(Generico) Switch SMD"
TP1 TP2: library part P_T_TP, "Test Point SMD", Supplier Part Number 1=279-RCT-0C, LatestRevisionDate=17-Jul-2002, LatestRevisionNote="Re-released for DXP Platform.", Origin=CHINA, PackageDescription="Axial Device, Thru-Hole; 2 Leads; 0.3 in Pin Spacing", PackageReference=AXIAL-0.3, Published=8-Jun-2000, Publisher="Altium Limited", Supplier 1=Mouser, Type=CONNECTOR
U1 U2: library part U_LDL1117, "LDL1117 Series 1.2 A 2.5 V High PSRR LDO Linear Voltage Regulator-SOT-223", Case/Package=TO-261-4, Manufacturer=STMicroelectronics, Manufacturer Part Number=LDL1117S25R, Max Operating Temperature=125°C, Max Supply Voltage=18V, Min Operating Temperature=-40°C, Min Output Voltage=2.5V, Min Supply Voltage=2.6V, Nominal Supply Current=250uA, Output Current=1.2A, Power Supply Rejection Ratio (PSRR)=65dB, Quiescent Current=500uA, Supplier Part Number 1=511-LDL1117S25R, Accuracy=2%, Category="Voltage Regulators - Linear", ComponentLink1Description=http://www.farnell.com/datasheets/2342741.pdf?src-supplier=Farnell, ComponentLink1URL=http://www.farnell.com/datasheets/2342741.pdf?src-supplier=Farnell, ComponentLink2Description=http://www.st.com/content/ccc/resource/technical/document/datasheet/group3/0e/5a/00/ca/10/1a/4f/a5/DM00366442/files/DM00366442.pdf/jcr:content/translations/en.DM00366442.pdf?src-supplier=Digikey, ComponentLink2URL=http://www.st.com/content/ccc/resource/technical/document/datasheet/group3/0e/5a/00/ca/10/1a/4f/a5/DM00366442/files/DM00366442.pdf/jcr:content/translations/en.DM00366442.pdf?src-supplier=Digikey, ComponentLink3Description=https://datasheet.octopart.com/LDL1117S25R-STMicroelectronics-datasheet-165583407.pdf?src-supplier=TME, ComponentLink3URL=https://datasheet.octopart.com/LDL1117S25R-STMicroelectronics-datasheet-165583407.pdf?src-supplier=TME, Height=1.8mm, Mounting Technology="Surface Mount", Number of Channels=1NUMBER, Number of Outputs=1NUMBER, Number of Regulators=1, Output Configuration=Positive, Output Type=Fixed, Output Voltage=2.5V, Packaging="Cut Tape", Pricing 1="1=1,1, 10=0,98, 50=0,935, 100=0,757, 1000=0,478, 10000=0,415 (USD)", RoHS=Yes, RoHS Compliant=Yes, Series=-, Stock 1=10345, Supplier 1=Mouser
U7: Supplier Part Number 1=220-1572-ND, Supplier 1=Digikey
U9: library part U_W25X40CLSNIG, Supplier Part Number 1=W25X40CLSNIG-ND, Supplier 1=Digikey
U10: library part MT9M001C12STM, "SENSOR 1/2 PULGADA 1 MEGAPIXEL", Supplier Part Number 1=30AC9943, ComponentLink1Description=DATASHEET, ComponentLink1URL=https://github.com/Fresita-codificadora/Proyecto_Final_DOME/blob/main/datasheet/HOJA_DE_DATOS_IMAGER_mt9m001_USADO_CON_FPGA.pdf, Supplier 1=Newark, Supplier 2=Farnell, Supplier Part Number 2=3613986
Y1: library part Y_12MHZ, Supplier Part Number 1=XC2882CT-ND, Supplier 1=Digikey

## Free pads (board coordinates)
  round 3 hole 2.45: 2(39.116,48.768) 2(39.116,105.41) 2(116.332,48.768) 2(116.332,105.156)
  round 0.7 hole 0.4 mask+0.102: 9(87.376,65.532)
  oval 1.524x10 smd: 10(39.37,95.504) 10(116.84,96.012)
  oval 10x1.524 smd: 10(49.657,48.641) 10(62.357,105.029) 10(105.537,48.641)

## Via types
v1: diameter 0.7, hole 0.4, Top Layer to Bottom Layer, tented both sides, 77 vias
v2: diameter 1.27, hole 0.711, Top Layer to Bottom Layer, tented both sides, 7 vias

## Nets (pads, with @x,y where several pads share a name; then routed paths per layer and width w, separated by ;. In a path a pad name is that pad's centre, name@x,y a point inside that pad or via, vN(x,y) a via of type N, cw(c..) or ccw(c..) an arc to the next point about the centre after c; other vN are vias at no path point)
1V2: C4.1 C24.1 C25.1 C26.1 C27.1 C30.2 C31.2 C32.2 C33.2 R5.1 R6.1 TP2.1 U2.2 U2.4 U7.27 U7.40 U7.92 U7.111 | length 137.8
  Top Layer w0.254: C32.2 69.623,73.347 U7.27 83.439,73.347 ; C27.1 75.681,64.359 U7.40 75.681,68.569 77.566,70.454 82.327,70.454 83.439,71.566 83.439,73.347 ; R6.1 80.203,58.955 81.627,57.531 84.074,57.531 86.487,59.944 v1(101.727,59.944) ; v1(84.963,73.406) 84.904,73.347 83.439,73.347 ; C25.1@90.691,91.3 90.681,91.291 U7.111 90.681,84.192 90.805,84.068 v1(90.805,83.947) ; v1(90.805,78.359) 90.817,78.347 U7.92 95.482,78.347 95.631,78.198 95.631,75.311 95.885,75.057 C24.1
  Top Layer w1.016: C26.1 69.542,75.425 69.542,73.292 C32.2 ; C33.2 C27.1 ; C25.1@90.691,91.3 95.237,91.3 C31.2 ; v1(101.727,59.944) 101.92,60.137 R5.1 ; R5.1@105.791,59.885 113.658,59.885 U2.4 U2.2 113.686,66.112 113.686,69.068 C4.1
  Bottom Layer w0.254: v1(84.963,73.406) 86.995,73.406 90.805,77.216 v1(90.805,78.359) v1(90.805,83.947)
  Bottom Layer w1.016: v1(90.805,78.359) 95.885,73.279 95.885,65.786 v1(101.727,59.944)
3V3: C2.1 C3.1 C7.2 C10.2 C11.2 C12.2 C13.2 C14.2 C15.2 C16.1 C17.1 C18.1 C19.1 C20.1 C21.1 C22.1 C23.1 C28.2 C29.2 C38.2 C39.2 C40.2 C41.2 C42.1 D3.2 L1.1 P4.1 R1.2 R4.2 R7.2 R8.2 R9.2 R10.2 R12.1 R16.2 R17.2 TP1.1 U1.2 U1.4 U2.3 U7.6 U7.30 U7.46 U7.57 U7.72 U7.89 U7.100 U7.123 U7.131 U9.8 Y1.1 Y1.4 | length 353.2
  Top Layer w0.178: v1(58.547,75.946) 59.055,76.454 61.683,76.454 62.13,76.901 R17.2 ; R1.2 62.931,90.993 69.241,84.683 69.241,84.134 C28.2
  Top Layer w0.254: 63.627,76.901 63.627,80.264 65.913,82.55 69.428,82.55 69.555,82.677 ; R16.2@64.643,76.901 64.67,76.928 65.625,76.928 R16.2@65.625,77.148 ; C22.1@69.107,81.086 C22.1 ; C29.2 70.59,71.12 70.739,71.269 70.739,71.606 70.98,71.847 U7.30 ; C28.2 69.582,83.847 U7.6 79.634,83.847 80.681,84.894 U7.131 80.681,89.767 80.532,89.916 79.248,89.916 78.981,90.183 78.981,92.431 C17.1@78.981,92.456 ; C20.1 77.978,65.383 78.127,65.532 78.532,65.532 78.681,65.681 U7.46 78.681,68.267 78.867,68.453 84.023,68.453 84.172,68.304 84.172,67.056 U7.57 84.181,65.679 84.582,65.278 C21.1 ; C16.1 85.852,90.065 85.703,89.916 84.83,89.916 84.681,89.767 U7.123 84.681,86.08 84.851,85.91 84.851,84.615 84.486,84.25 84.486,82.368 84.507,82.347 U7.100 96.51,82.347 C19.1 96.774,82.083 96.774,81.28 96.86,81.194 C42.1 ; U7.72 91.681,65.672 91.821,65.532 C40.2 ; U7.89 94.962,76.847 95.123,76.686 95.123,73.533 95.758,72.898 C18.1
  Top Layer w0.635: v1(63.5,47.879) 74.388,47.879 76.633,50.124
  Top Layer w1.016: R17.2 63.627,76.901 R16.2@64.643,76.901 ; v1(63.5,68.58) 63.519,68.561 63.519,67.123 L1.1 68.833,67.056 69.361,67.584 69.361,68.894 C23.1 C29.2 ; C22.1 69.555,82.677 C28.2 ; 76.633,50.124 80.813,50.124 ; R10.2 R12.1 76.705,55.944 79.504,55.944 R9.2 R8.2 79.568,51.369 80.813,50.124 ; C11.2 C17.1@78.981,92.431 ; C21.1 C15.2 C14.2 C40.2 C41.2 94.047,64.154 95.925,64.154 96.52,63.559 v1(96.52,62.357) ; C16.1 85.865,91.3 88.125,91.3 C10.2 ; 86.233,51.943 C38.2 ; R7.2 99.38,56.703 v1(99.441,56.642) 99.441,53.467 ; C19.1@96.561,82.347 C13.2 ; C18.1 C12.2 97.009,70.545 97.009,69.361 98.425,67.945 101.473,67.945 103.759,70.231 106.045,70.231 v1(106.172,70.104) TP1.1@106.172,72.908 ; D3.2 102.616,90.649 ; P4.1@103.505,53.213 103.251,53.467 99.441,53.467 ; R4.2 104.902,100.391 104.902,97.282 102.616,94.996 102.616,90.649 ; TP1.1@106.182,73.142 104.531,73.142 102.057,75.616 Y1.4 Y1.1 102.057,81.127 101.99,81.194 C42.1 102.048,81.261 103.613,81.261 104.267,81.915 104.267,85.471 102.616,87.122 102.616,90.649 ; TP1.1@106.299,72.999 111.353,72.999 U1.4 ; U2.3 111.365,72.959 U1.4 ; C3.1@111.379,84.963 U1.2 U1.4 ; C2.1 116.061,72.956 111.396,72.956 U1.4 ; 80.813,50.124 C39.2 C38.2 ; C38.2 96.098,50.124 99.441,53.467
  Bottom Layer w0.178: v1(58.547,75.946) 58.489,76.004 55.466,76.004 54.933,75.471 54.933,72.829 56.338,71.424 60.656,71.424 v1(63.5,68.58)
  Bottom Layer w0.635: v1(63.5,47.879) v1(63.5,68.58)
  Bottom Layer w1.016: v1(96.52,62.357) 96.52,60.706 99.441,57.785 v1(99.441,56.642) 105.537,56.642 106.172,57.277 v1(106.172,70.104)
Btn_1: C8.2 R3.2 U7.31 | length 48.7
  Top Layer w0.254: U7.31 80.237,71.347 v1(80.264,71.374)
  Top Layer w1.016: R3.2 59.338,85.058 61.693,85.058 C8.2 64.048,85.087 64.643,85.682 v1(64.643,85.852)
  Bottom Layer w0.254: v1(64.643,85.852) 74.752,85.852 74.861,85.961 81.044,85.961 83.439,83.566 83.439,71.628 83.185,71.374 v1(80.264,71.374)
GND: C1.2 C2.2 C3.2 C4.2 C5.1 C6.1 C7.1 C8.1 C9.1 C10.1 C11.1 C12.1 C13.1 C14.1 C15.1 C16.2 C17.2 C18.2 C19.2 C20.2 C21.2 C22.2 C23.2 C24.2 C25.2 C26.2 C27.2 C28.1 C29.1 C30.1 C31.1 C32.1 C33.1 C38.1 C39.1 C40.1 C41.1 C42.2 C43.1 C44.1 C45.1 D1.2 D2.1 D4.1 P2.7 P4.2 P4.3 pad.9 pad.10 R15.1 S1.2 U1.1 U2.1 U7.5 U7.13 U7.14 U7.59 U7.69 U7.86 U7.103 U7.132 U7.140 U9.4 U10.5 U10.15 U10.17 U10.18 U10.21 U10.23 U10.38 U10.43 U10.47 U10.48 Y1.2 | length 7.2
  Top Layer w0.178: U7.5 74.568,84.347 74.676,84.455 ; 78.74,89.535 78.966,89.309 80.077,89.309 80.181,89.205 U7.132 80.181,86.658 79.629,86.106
  other v1: 70.866,83.058
  other v2: 57.658,54.229 102.489,63.246 101.6,72.39 38.735,77.851 87.884,79.502 107.823,93.472 60.325,101.219
Led_1: R2.2 U7.1 | length 18.6
  Top Layer w0.254: R2.2 63.308,92.202 69.163,86.347 U7.1
NetC1_1: C1.1 C5.2 C6.2 D1.1 F1.2 U1.3 | length 14.1
  Top Layer w1.016: C6.2 106.443,79.19 U1.3@109.062,79.19 ; U1.3 U1.3@109.062,79.19 ; F1.2 D1.1 109.047,88.36 109.047,79.205 U1.3@109.062,79.19
NetC9_2: C9.2 P3.A10 R4.1 U7.117 | length 45.9
  Top Layer w0.178: U7.117 87.681,86.309 88.265,85.725 v1(88.265,85.598)
  Top Layer w0.635: P3.A10 98.044,102.616 99.568,104.14 106.562,104.14 106.748,103.954 106.934,103.768 106.934,102.825 C9.2 C9.2@106.86,102.735 ; R4.1@106.86,100.465 R4.1
  Top Layer w1.016: R4.1@106.86,100.465 C9.2@106.86,102.735
  Bottom Layer w0.178: v1(88.265,85.598) 88.188,85.675 88.188,103.936 88.646,104.394 94.107,104.394 94.361,104.14 P3.A10
NetC34_1: C34.1 C35.1 R5.2 U7.126 | length 47
  Top Layer w0.254: C35.1 83.408,91.282 83.408,89.74 83.181,89.513 83.181,86.882 82.423,86.124 82.423,81.788 92.171,72.04 92.171,68.357 94.742,65.786 104.267,65.786 105.791,64.262 R5.2
  Top Layer w1.016: C34.1 C35.1@83.228,91.227
NetC34_2: C34.2 C35.2 U7.127 | length 11.2
  Top Layer w0.178: v1(82.677,90.043) 82.681,90.039 U7.127 ; v1(82.677,94.742) 82.677,93.263 C35.2
  Top Layer w1.016: C34.2 81.278,93.177 81.364,93.263 82.828,93.263 83.314,93.263 C35.2
  Bottom Layer w0.178: v1(82.677,90.043) v1(82.677,94.742)
NetC36_1: C36.1 C37.1 R6.2 U7.54 | length 8.2
  Top Layer w0.254: C37.1 82.128,64.9 82.677,65.449 82.677,67.043 U7.54
  Top Layer w1.016: R6.2 82.115,59.067 82.115,61.087 82.115,63.869 C37.1
NetC36_2: C36.2 C37.2 U7.53 | length 6.8
  Top Layer w0.254: C37.2 80.178,65.192 80.391,65.405 81.915,65.405 82.169,65.659 U7.53@82.169,66.167
  Top Layer w1.016: C36.2 C37.2
NetC45_2: C45.2 R14.1 U7.24 U10.10 | length 44.3
  Top Layer w0.254: U7.24 73.997,74.847 v1(74.549,74.295)
  Top Layer w0.381: C45.2 46.53,56.649 U10.10 46.53,61.516 57.277,72.263 v1(57.277,74.295)
  Top Layer w1.016: R14.1 44.082,56.588 46.469,56.588 C45.2
  Bottom Layer w0.254: v1(57.277,74.295) v1(74.549,74.295)
NetD2_2: D2.2 R2.1 | length 2.9
  Top Layer w1.016: D2.2 R2.1
NetD3_1: D3.1 U7.108 | length 5.4
  Top Layer w0.254: U7.108 96.634,86.347 97.387,87.1 98.403,87.1 D3.1
NetD4_2: D4.2 P2.1 R12.2 U7.65 | length 41.6
  Top Layer w0.254: v1(80.518,69.723) 80.667,69.723 81.175,69.215 87.122,69.215 88.172,68.165 88.172,67.056 U7.65
  Top Layer w1.016: D4.2 62.355,64.856 62.441,64.77 P2.1 ; v1(69.723,59.69) 73.312,56.101 74.648,56.101 R12.2
  Bottom Layer w0.254: P2.1 69.215,64.77 ; v1(69.723,59.69) 69.723,64.262 69.215,64.77 ; v1(80.518,69.723) 78.105,69.723 73.152,64.77 69.215,64.77